# Altium PCB all_pcb.PcbDoc
Units mm, origin at the board's own origin, x right, y up, seen from the top; angles counter-clockwise.
Board outline 30 x 24 mm, 2 copper layers (Top Layer, Bottom Layer); 57 components, 43 nets, 194 pads, 0 vias.
Unrouted connection lines stored in the file: 131.
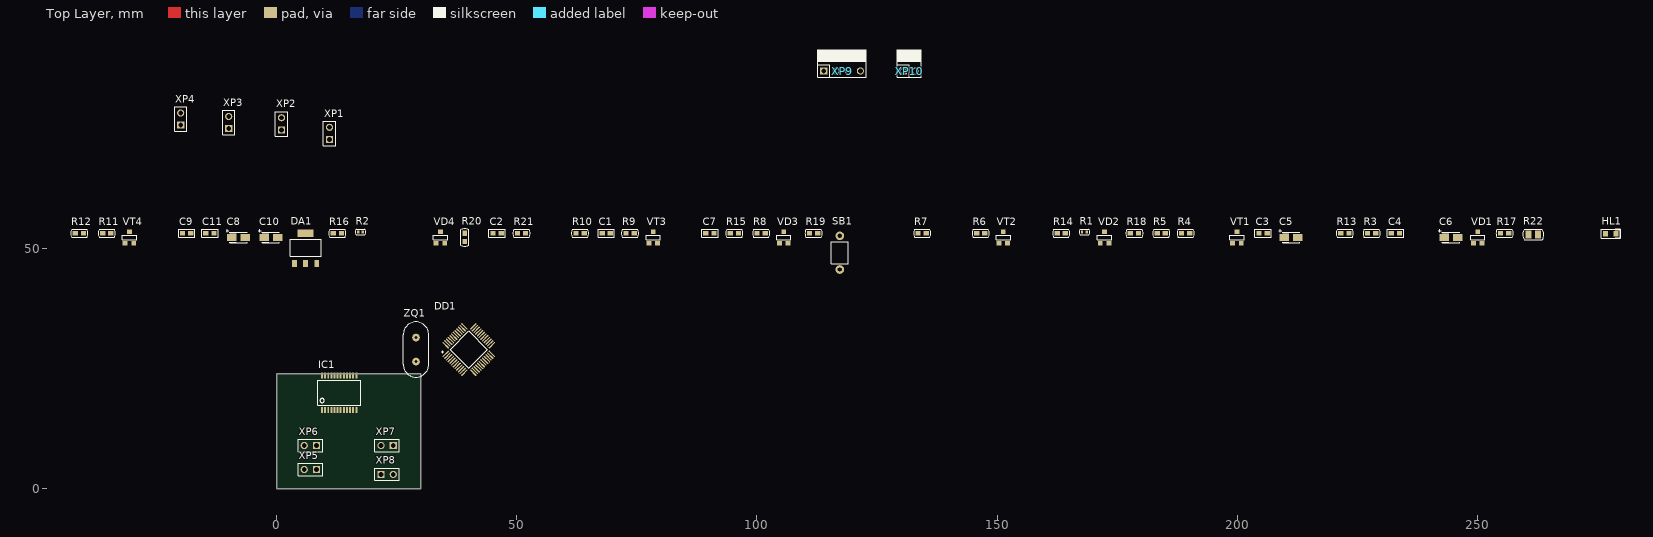
[diagram p0: Top Layer view]
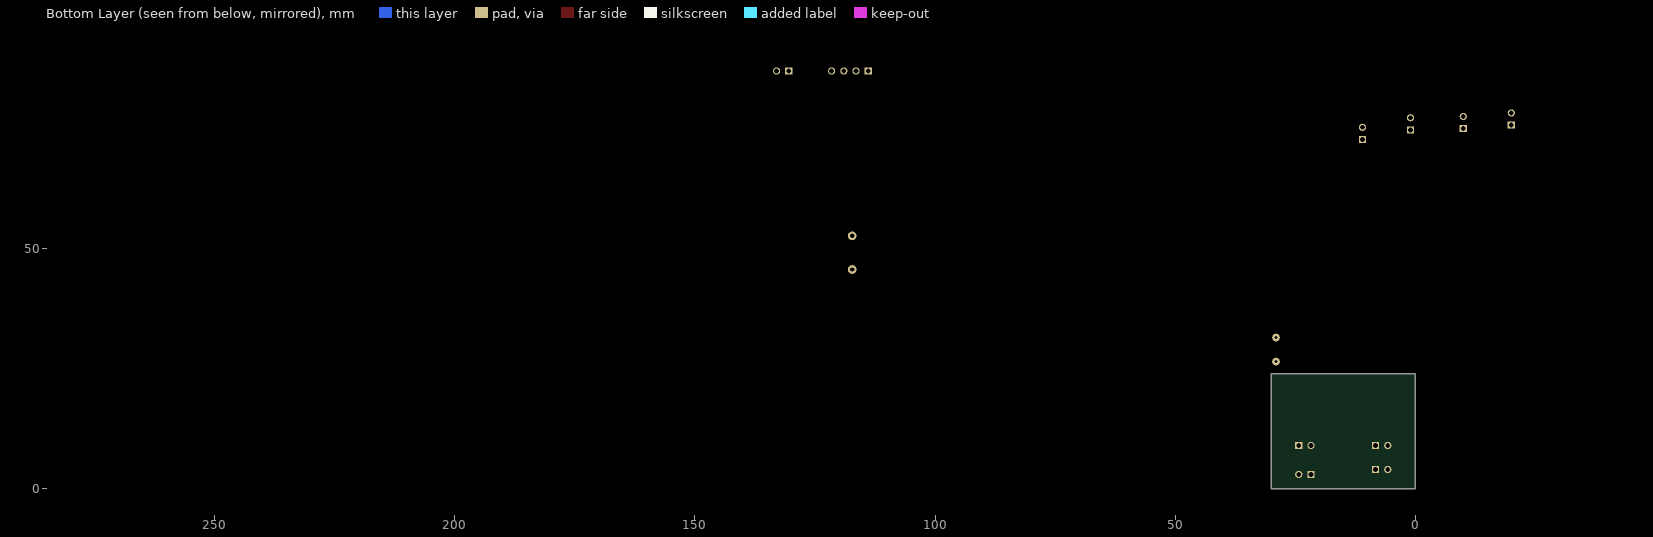
[diagram p1: Bottom Layer view, seen from below]

## Layer stack, top to bottom
Top Solder: solder mask 0.0102, Solder Resist, Dk 3.5
Top Layer: signal copper 0.0356
Dielectric 1: dielectric 0.32, FR-4, Dk 4.8
Bottom Layer: signal copper 0.0356
Bottom Solder: solder mask 0.0102, Solder Resist, Dk 3.5

## Board outline
0,0 30,0 30,24 0,24

## Design rules (kind name [scope] priority, off if disabled: settings)
Clearance [All] p1: gap=0.254 ignorepadtopadclearanceinfootprint=FALSE except(0: Arc-Hole Track-Hole SMDPad-Hole THPad-Hole Via-Hole Fill-Hole Poly-Hole Region-Hole Text-Hole)
PolygonConnect [All] p1: connectstyle=Relief reliefconductorwidth=0.254 reliefentries=4 polygonreliefangle="90 Angle" airgapwidth=0.254
RoutingVias [All] p1: holewidth=0.711 width=1.27 viastyle="Through Hole" minholewidth=0.711 minwidth=1.27 maxholewidth=0.711 maxwidth=1.27
SolderMaskExpansion [All] p1: expansion=0.102 istentingtop=FALSE
Width [All] p1: maxlimit=0.254 minlimit=0.254 preferedwidth=0.254
30 further rules are at their usual default settings.

## Classes and differential pairs
component class Sheet1: C1 C2 C3 C4 C5 C7 C8 C9 C10 C11 DA1 DD1 HL1 IC1 R1 R2 R3 R4 R5 R6 R7 R8 R9 R10 R11 R12 R13 R14 R15 R16 R17 R18 R19 R20 R21 R22 SB1 VD1 VD2 VD3 VD4 VT1 VT2 VT3 VT4 XP1 XP2 XP3 XP4 XP6 XP8 XP9 XP10 ZQ1

## Components (designator, comment, footprint, x,y, rotation, side; value= is the part's Value field where it differs from the comment)
C1 "Capacitor" C0603 68.628,53.227 r0 top value=30pF
C2 "Capacitor" C0603 45.895,53.227 r0 top value=30pF
C3 "Capacitor" C0603 205.407,53.227 r0 top value=0.1uF
C4 "Capacitor" C0603 232.966,53.227 r0 top value=0.1uF
C5 "Capacitor-T" C3216-p 211.249,52.338 r0 top value=10uF
C6 "Capacitor-T" C3216-p 244.523,52.338 r0 top value=10uF
C7 "Capacitor" C0603 90.218,53.227 r0 top value=0.1uF
C8 "Capacitor-T" C3216-p -7.953,52.338 r0 top value=10uF
C9 "Capacitor" C0603 -18.748,53.227 r0 top value=0.1uF
C10 "Capacitor-T" C3216-p -1.222,52.338 r0 top value=10uF
C11 "Capacitor" C0603 -13.922,53.227 r0 top value=0.1uF
DA1 "LM1117-Series" SOT-223 6.017,50.179 r0 top value=LM1117MPX-ADJ
DD1 "STM32F103Cxxx-Series" LQFP-48 40,29 r45 top value=STM32F103C8T6
HL1 "Text" LD0805 277.797,53.1 r0 top value=KP-2012SGC
IC1 "TB6612FNG" SSOP24 13,20 r0 top
R1 "Resistor" R0402 168.196,53.481 r0 top value=100k
R2 "Resistor" R0402 17.447,53.481 r0 top value=100k
R3 "Resistor" R0603 228.013,53.227 r0 top value=10k
R4 "Resistor" R0603 189.278,53.227 r0 top value=10k
R5 "Resistor" R0603 184.198,53.227 r0 top value=100k
R6 "Resistor" R0603 146.606,53.227 r0 top value=10k
R7 "Resistor" R0603 134.414,53.227 r0 top value=10k
R8 "Resistor" R0603 100.886,53.227 r0 top value=10k
R9 "Resistor" R0603 73.581,53.227 r0 top value=10k
R10 "Resistor" R0603 63.167,53.227 r0 top value=100k
R11 "Resistor" R0603 -35.385,53.227 r0 top value=10k
R12 "Resistor" R0603 -41.1,53.227 r0 top value=10k
R13 "Resistor" R0603 222.425,53.227 r0 top value=1k
R14 "Resistor" R0603 163.37,53.227 r0 top value=1k
R15 "Resistor" R0603 95.298,53.227 r0 top value=1k
R16 "Resistor" R0603 12.621,53.227 r0 top value=1k
R17 "Resistor" R0603 255.699,53.227 r0 top value=1k
R18 "Resistor" R0603 178.61,53.227 r0 top value=1k
R19 "Resistor" R0603 111.808,53.227 r0 top value=1k
R20 "Resistor" R0603 39.164,52.338 r90 top value=1k
R21 "Resistor" R0603 50.975,53.227 r0 top value=200k
R22 "Resistor" R0805 261.668,52.973 r0 top value=68
SB1 "reset" DTS-32 117.269,49.163 r0 top value=DTS-32
VD1 "Zener" SOT-23 250.111,52.338 r0 top value=BZX84-C3V3
VD2 "Zener" SOT-23 172.387,52.338 r0 top value=BZX84-C3V3
VD3 "Zener" SOT-23 105.585,52.338 r0 top value=BZX84-C3V3
VD4 "Zener" SOT-23 34.084,52.338 r0 top value=BZX84-C3V3
VT1 "BJT-PNP" SOT-23 199.946,52.338 r0 top value=BC857
VT2 "BJT-PNP" SOT-23 151.305,52.338 r0 top value=BC857
VT3 "BJT-PNP" SOT-23 78.407,52.338 r0 top value=BC857
VT4 "BJT-PNP" SOT-23 -30.686,52.338 r0 top value=BC857
XP1 "in11" PLS-2 11,74 r90 top value=PLS-2
XP2 "in12" PLS-2 1,76 r90 top value=PLS-2
XP3 "in11" PLS-2 -10,76.27 r90 top value=PLS-2
XP4 "in12" PLS-2 -20,77 r90 top value=PLS-2
XP5 "Motor(A)12" PLS-2 7,4 r180 top value=PLS-2
XP6 "Motor(A)11" PLS-2 7,9 r180 top value=PLS-2
XP7 "Motor(B)21" PLS-2 23,9 r180 top value=PLS-2
XP8 "Motor(B)22" PLS-2 23,3 r0 top value=PLS-2
XP9 "frimware" PLS-4RR 117.73,87 r0 top value=PLS-4R
XP10 "usart3" PLS-2RR 131.73,87 r0 top value=PLS-2R
ZQ1 "Crystal" HC-49S 29,29 r90 top value="HC-49S 8MHz"

## Footprints (in the part's own frame and the unit in brackets; to place one, negate y for a bottom-side part, rotate by r counter-clockwise, add the part's x,y. Pads: shape width x height; smd on the part's side, far side on the other; paste and mask are expansions set on the pad)
C0603 [mm] "1608M"
  rect 1.1x1 smd: 1(-0.85,0) 2(0.85,0)
  silkscreen extent -1.7,-0.8 1.7,0.8, body extent -0.8,-0.4 0.8,0.4, height 0.91
C3216-p [mm] "Type A"
  rect 2x1.4 smd: 1(-1.4,0) 2(1.4,0)
  silkscreen extent -2.6,-1.1 1.8,1.7, body extent -1.6,-0.8 1.6,0.8, height 1.8
DTS-32 [mm] "1 contact, 0.05A, 250V, H=5mm"
  round 1.8 hole 0.9: 1(0,3.5) 2(0,-3.5)
  silkscreen extent -1.75,-2.25 1.75,2.25, body extent -1.75,-4 1.75,4, height 5.5
HC-49S [mm] "HC49 Short Through-hole Mount Footprint"
  round 1.6 hole 0.6: 1(-2.5,0) 3(2.5,0)
  silkscreen extent -5.75,-2.65 5.75,2.65, body extent -5.68,-2.3 5.68,2.35, height 5
LD0805 [mm]
  rect 1.1x1.1 smd: 1(-1.1,0) 2(1.1,0)
  silkscreen extent -2,-0.9 2,0.9, body extent -1,-0.62 1,0.63, height 0.73
LQFP-48 [mm] "Thin QFP, 48-Leads, Body 7x7mm, Pitch 0.5mm, IPC Medium Density"
  oval 1.8x0.3 smd: 1(-4.05,2.75) 2(-4.05,2.25) 3(-4.05,1.75) 4(-4.05,1.25) 5(-4.05,0.75) 6(-4.05,0.25) 7(-4.05,-0.25) 8(-4.05,-0.75) 9(-4.05,-1.25) 10(-4.05,-1.75) 11(-4.05,-2.25) 12(-4.05,-2.75) 25(4.05,-2.75) 26(4.05,-2.25) 27(4.05,-1.75) 28(4.05,-1.25) 29(4.05,-0.75) 30(4.05,-0.25) 31(4.05,0.25) 32(4.05,0.75) 33(4.05,1.25) 34(4.05,1.75) 35(4.05,2.25) 36(4.05,2.75)
  oval 0.3x1.8 smd: 13(-2.75,-4.05) 14(-2.25,-4.05) 15(-1.75,-4.05) 16(-1.25,-4.05) 17(-0.75,-4.05) 18(-0.25,-4.05) 19(0.25,-4.05) 20(0.75,-4.05) 21(1.25,-4.05) 22(1.75,-4.05) 23(2.25,-4.05) 24(2.75,-4.05) 37(2.75,4.05) 38(2.25,4.05) 39(1.75,4.05) 40(1.25,4.05) 41(0.75,4.05) 42(0.25,4.05) 43(-0.25,4.05) 44(-0.75,4.05) 45(-1.25,4.05) 46(-1.75,4.05) 47(-2.25,4.05) 48(-2.75,4.05)
  silkscreen extent -4.37,-2.75 2.75,3.62, body extent -4.5,-4.5 4.5,4.5, height 1.5
PLS-2 [mm]
  rect 1.5x1.5 hole 1: 1(-1.27,0)
  round 1.5 hole 1: 2(1.27,0)
  silkscreen extent -2.54,-1.27 2.54,1.27, body extent -2.54,-1.27 2.54,1.27, height 8.9
PLS-2RR [mm]
  rect 1.5x1.5 hole 1: 1(-1.27,0)
  round 1.5 hole 1: 2(1.27,0)
  silkscreen extent -2.54,-1.27 2.54,4.44, body extent -2.54,-0.32 2.54,9.81, height 3.01
PLS-4RR [mm]
  rect 1.5x1.5 hole 1: 1(-3.81,0)
  round 1.5 hole 1: 2(-1.27,0) 3(1.27,0) 4(3.81,0)
  silkscreen extent -5.08,-1.27 5.08,4.44, body extent -5.08,-0.32 5.08,9.81, height 3.01
R0402 [mm] "1005M"
  rect 0.5x0.7 smd: 1(-0.5,0) 2(0.5,0)
  silkscreen extent -1.1,-0.6 1.1,0.6, body extent -0.5,-0.25 0.5,0.25, height 0.4
R0603 [mm] "1608M"
  rect 1.1x1 smd: 1(-0.85,0) 2(0.85,0)
  silkscreen extent -1.8,-0.8 1.8,0.8, body extent -0.8,-0.4 0.8,0.4, height 0.38
R0805 [mm] "2012M"
  rect 1.2x1.6 smd: 1(-1,0) 2(1,0)
  silkscreen extent -2.2,-1.1 2.2,1.1, body extent -1,-0.6 1,0.6, height 0.5
SOT-23 [mm] "КТ-46"
  rect 1x1 smd: 1(-0.9,-1.2) 2(0,1.2) 3(0.9,-1.2)
  silkscreen extent -1.5,-0.5 1.5,0.5, body extent -1.5,-1.15 1.5,1.15, height 1.11
SOT-223 [mm]
  rect 1x1.5 smd: 1(-2.3,-3.25) 2(0,-3.25) 3(2.3,-3.25)
  rect 3.3x1.5 smd: 2(0,3.05)
  silkscreen extent -3.25,-1.75 3.25,1.75, body extent -3.25,-3.53 3.25,3.43, height 1.65
SSOP24 [mm]
  rect 0.4x1.25 smd: 1(-3.575,-3.625) 2(-2.925,-3.625) 3(-2.275,-3.625) 4(-1.625,-3.625) 5(-0.975,-3.625) 6(-0.325,-3.625) 7(0.325,-3.625) 8(0.975,-3.625) 9(1.625,-3.625) 10(2.275,-3.625) 11(2.925,-3.625) 12(3.575,-3.625) 13(3.575,3.625) 14(2.925,3.625) 15(2.275,3.625) 16(1.625,3.625) 17(0.975,3.625) 18(0.325,3.625) 19(-0.325,3.625) 20(-0.975,3.625) 21(-1.625,3.625) 22(-2.275,3.625) 23(-2.925,3.625) 24(-3.575,3.625)
  silkscreen extent -4.45,-2.6 4.45,2.6, body extent -3.9,-3.8 3.9,3.8, height 1.6

## Part data
C1 C2: library part GRM1885C1H300FA01D, "30pF 0603", Dielectric Type=NP0, Manufacturer=Murata, Tolerance=±1%, Voltage=50V, Application Category=1, ID=168, Part Number=GRM1885C1H300FA01D, Published=18.05.2010, Publisher="Andrew Danich", Type=Конденсатор
C3 C4 C9 C11: library part GRM188R71C104KA01D, "0.1 uF", Dielectric Type=X7R, Manufacturer=Murata, Tolerance=±10%, Voltage=16V, Working Temperature Max=+125°С, Working Temperature Min=-55°С, Application Category=1, ID=131, Part Number=GRM188R71C104KA01D, Published=18.05.2010, Publisher="Andrew Danich", Type=Конденсатор
C5 C6 C8 C10: library part T491A106K006AT, "10 uF", Leakage Current=600nA, Manufacturer=Kemet, Tolerance=±10%, Voltage=6.3V, Working Temperature Max=+125°С, Working Temperature Min=-55°С, Application Category=1, ESR=4ohm, ID=25, Part Number=T491A106K006AT, Published=23.04.2010, Publisher="Andrew Danich", Type=Конденсатор
C7: library part GRM188R71C104KA01D, "0.1 uF 0603", Dielectric Type=X7R, Manufacturer=Murata, Tolerance=±10%, Voltage=16V, Working Temperature Max=+125°С, Working Temperature Min=-55°С, Application Category=1, ID=131, Part Number=GRM188R71C104KA01D, Published=18.05.2010, Publisher="Andrew Danich", Type=Конденсатор
DA1: library part LM1117MPX-ADJ, Input Voltage=+8.5…20V, Output Current=800mA, Output Voltage=+ADJ, ID=5, Part Number=LM1117MPX-ADJ, Published=13.08.2015, Publisher="Andrew Danich", Type=Микросхема
DD1: library part STM32F103C8T6, Manufacturer=STMicroelectronics, Operation Frequency=72MHz, Working Temperature Max=+85°С, Working Temperature Min=-40°С, Application Category=1, EEPROM=-, Flash=64K, I/O Lines=37, ID=20, Part Number=STM32F103C8T6, Prog Interface="JTAG, SWD, UART", Published=16.10.2015, Publisher="Andrew Danich", SRAM=20K, Supply Operation=+2.0…3.6V, Type=Микросхема
HL1: library part KP-2012SGC, Color=Green, Forward Current=25mA, Forward Voltage=2.5V, Manufacturer=Kingbright, Power Dissipation=62.5mW, Working Temperature Max=+85°С, Working Temperature Min=-40°С, Application Category=1, ID=21, Leds=1, Part Number=KP-2012SGC, Published=03.12.2013, Publisher="Andrew Danich", Type="Индикатор единичный"
IC1: "Motor Driver Power MOSFET Parallel 24-SSOP", Package=None, Availability="In Stock", Check_prices=https://www.snapeda.com/parts/TB6612FNG/Toshiba/view-part/6765825/?ref=eda, MF=Toshiba, MP=TB6612FNG, Price=None, Purchase-URL=https://pricing.snapeda.com/search/part/TB6612FNG/?ref=eda, SnapEDA_Link=https://www.snapeda.com/parts/TB6612FNG/Toshiba/view-part/6765825/?ref=snap
R1 R2: library part RC0402FR-07100KL, "10k", Limit Voltage=50V, Manufacturer=Yageo, Temperature Coefficient=100ppm, Tolerance=±1%, Total Power Dissipation=0.1W, Working Temperature Max=+155°С, Working Temperature Min=-55°С, Application Category=1, ID=1, Part Number=RC0402FR-07100KL, Published=24.03.2010, Publisher="Andrew Danich", Series Type=Thick-Film, Type=Резистор
R3 R4 R6 R7 R8 R9 R11 R12: library part RC0603JR-0710KL, "10K", Limit Voltage=50V, Manufacturer=Yageo, Temperature Coefficient=100ppm, Tolerance=±5%, Total Power Dissipation=0.1W, Working Temperature Max=+155°С, Working Temperature Min=-55°С, Application Category=1, Functional Analog=CR0603-JW-103E, ID=12, Part Number=RC0603JR-0710KL, Published=24.03.2010, Publisher="Andrew Danich", Series Type=Thick-Film, Type=Резистор
R5 R10: library part RC0603JR-07100KL, "100k", Limit Voltage=50V, Manufacturer=Yageo, Temperature Coefficient=100ppm, Tolerance=±5%, Total Power Dissipation=0.1W, Working Temperature Max=+155°С, Working Temperature Min=-55°С, Application Category=1, Functional Analog=CR0603-JW-104E, ID=11, Part Number=RC0603JR-07100KL, Published=24.03.2010, Publisher="Andrew Danich", Series Type=Thick-Film, Type=Резистор
R13 R14 R15 R16 R17 R18 R19 R20: library part RC0603JR-071KL, "1k", Limit Voltage=50V, Manufacturer=Yageo, Temperature Coefficient=100ppm, Tolerance=±5%, Total Power Dissipation=0.1W, Working Temperature Max=+155°С, Working Temperature Min=-55°С, Application Category=1, Functional Analog=CR0603-JW-102E, ID=19, Part Number=RC0603JR-071KL, Published=24.03.2010, Publisher="Andrew Danich", Series Type=Thick-Film, Type=Резистор
R21: library part RC0603FR-07200KL, "200 kOm", Limit Voltage=50V, Manufacturer=Yageo, Temperature Coefficient=100ppm, Tolerance=±1%, Total Power Dissipation=0.1W, Working Temperature Max=+155°С, Working Temperature Min=-55°С, Application Category=1, ID=348, Part Number=RC0603FR-07200KL, Published=24.03.2010, Publisher="Andrew Danich", Series Type=Thick-Film, Type=Резистор
R22: library part RC0805JR-0768RL, Limit Voltage=150V, Manufacturer=Yageo, Temperature Coefficient=100ppm, Tolerance=±5%, Total Power Dissipation=0.125W, Working Temperature Max=+155°С, Working Temperature Min=-55°С, Application Category=1, ID=158, Part Number=RC0805JR-0768RL, Published=24.03.2010, Publisher="Andrew Danich", Series Type=Thick-Film, Type=Резистор
SB1: library part DTS-32, Isolator Resistance=100meg, Limit Current=50mA, Limit Voltage=250V, Resistance=0.1ohm, Application Category=1, Backlight=NO, Height=5mm, ID=26, Number of Contacts=2, Part Number=DTS-32, Published=17.04.2014, Publisher="Andrew Danich", Type=Переключатель
VD1 VD2 VD3 VD4: library part BZX84-C3V3, Capacitance=450pF, Differential resistance=95ohm, Forward Current=200mA, Forward Voltage=0.9V, Manufacturer=NXP, Reverse Current=5uA, Total Power Dissipation=250mW, Working Temperature Max=+150°С, Working Temperature Min=-65°С, Working Voltage=3.3V, Application Category=1, ID=10, Part Number=BZX84-C3V3, Published=20.05.2013, Publisher="Andrew Danich", Type=Стабилитрон
VT1 VT2 VT3 VT4: library part BC857, C-E Saturation Voltage=0.6V, C-E Voltage=45V, Collector Current=100mA, DC Current Gain=125…800, Total Power Dissipation=250mW, Transition Frequency=100MHz, ID=2, Part Number=BC857, Published=07.05.2013, Publisher="Andrew Danich", Type=Транзистор
XP1 XP2 XP3 XP4 XP5 XP6 XP7 XP8: library part PLS-2, Limit Current=3A, Limit Voltage=250V, Resistance=15momh, Connector Type=Male, ID=1, Part Number=PLS-2, Pins=2, Pitch=2.54mm, Published=07.03.2013, Publisher="Andrew Danich", Surface Finish=Gold, Type=Вилка
XP9: library part PLS-4R, Limit Current=3A, Limit Voltage=250V, Resistance=15momh, Connector Type=Male, ID=31, Part Number=PLS-4R, Pins=4, Pitch=2.54mm, Published=07.03.2013, Publisher="Andrew Danich", Surface Finish=Gold, Type=Вилка
XP10: library part PLS-2R, Limit Current=3A, Limit Voltage=250V, Resistance=15momh, Connector Type=Male, ID=29, Part Number=PLS-2R, Pins=2, Pitch=2.54mm, Published=07.03.2013, Publisher="Andrew Danich", Surface Finish=Gold, Type=Вилка
ZQ1: library part "HC-49S 8MHz", "8MHz", Load Capacitance=22pF, ID=4, Output Frequency=8MHz, Part Number="HC-49S 8MHz", Published=08.03.2013, Publisher="Andrew Danich", Type=Резонатор

## Nets (pads, with @x,y where several pads share a name; then routed paths per layer and width w, separated by ;. In a path a pad name is that pad's centre, name@x,y a point inside that pad or via, vN(x,y) a via of type N, cw(c..) or ccw(c..) an arc to the next point about the centre after c; other vN are vias at no path point)
+7.4: C3.1 C5.1 C8.1 C9.1 DA1.3 IC1.13 IC1.14 IC1.24 R5.1 R7.1 R10.1 R12.1 VT1.3 VT2.3 VT3.3 VT4.3 XP1.2 XP3.2 XP5.2 XP7.2
GND: C1.1 C2.1 C3.2 C4.1 C5.2 C6.2 C7.2 C8.2 C9.2 C10.2 C11.2 DA1.1 DD1.8 DD1.23 DD1.35 DD1.44 DD1.47 IC1.3 IC1.4 IC1.9 IC1.10 IC1.18 R1.2 R2.2 R3.1 R8.1 R22.2 SB1.2 VD1.1 VD2.1 VD3.1 VD4.1 XP2.2 XP4.2 XP6.2 XP8.2 XP9.4
NetC1_2: C1.2 DD1.5 ZQ1.3
NetC2_2: C2.2 R21.1 ZQ1.1
NetC7_1: C7.1 DD1.7 SB1.1
NetDD1_6: DD1.6 R21.2
NetDD1_10: DD1.10 DD1.11 R17.1
NetDD1_12: DD1.12 DD1.13 R18.1
NetDD1_20: DD1.20 IC1.16
NetDD1_21: DD1.21 XP10.2
NetDD1_22: DD1.22 XP10.1
NetDD1_29: DD1.29 DD1.30 R19.1
NetDD1_31: DD1.31 DD1.32 R20.1
NetDD1_34: DD1.34 XP9.2
NetDD1_37: DD1.37 XP9.3
NetDD1_39: DD1.39 IC1.17
NetDD1_40: DD1.40 IC1.22
NetDD1_41: DD1.41 IC1.21
NetDD1_42: DD1.42 IC1.19
NetDD1_45: DD1.45 IC1.15
NetDD1_46: DD1.46 IC1.23
NetHL1_2: HL1.2 R22.1
NetIC1_1: IC1.1 IC1.2 XP5.1
NetIC1_5: IC1.5 IC1.6 XP6.1
NetIC1_7: IC1.7 IC1.8 XP8.1
NetIC1_11: IC1.11 IC1.12 XP7.1
NetR1_1: R1.1 R14.2 R18.2 VD2.2
NetR2_1: R2.1 R16.2 R20.2 VD4.2
NetR3_2: R3.2 R13.1 R17.2 VD1.2
NetR4_1: R4.1 XP1.1
NetR4_2: R4.2 R5.2 VT1.1
NetR6_1: R6.1 XP2.1
NetR6_2: R6.2 R7.2 VT2.1
NetR8_2: R8.2 R15.1 R19.2 VD3.2
NetR9_1: R9.1 XP3.1
NetR9_2: R9.2 R10.2 VT3.1
NetR11_1: R11.1 XP4.1
NetR11_2: R11.2 R12.2 VT4.1
NetR13_2: R13.2 VT1.2
NetR14_1: R14.1 VT2.2
NetR15_2: R15.2 VT3.2
NetR16_1: R16.1 VT4.2
VCC: C4.2 C6.1 C10.1 C11.1 DA1.2 DD1.1 DD1.9 DD1.24 DD1.36 DD1.48 HL1.1 IC1.20 XP9.1
pads on no net: DD1.2 DD1.3 DD1.4 DD1.14 DD1.15 DD1.16 DD1.17 DD1.18 DD1.19 DD1.25 DD1.26 DD1.27 DD1.28 DD1.33 DD1.38 DD1.43 VD1.3 VD2.3 VD3.3 VD4.3

## Silkscreen, mask and mechanical layers (free items; w line width, h text height)
Mechanical 13:
  the board outline again, w0.254